# Altium PCB KC_Input_VAS_4L.PcbDoc
Units mil, origin at the board's own origin, x right, y up, seen from the top; angles counter-clockwise.
Board outline 2657.5 x 1450 mil, 4 copper layers (Component Side, Signal Layer 1, Signal Layer 2, Bottom Side), stack 33.234 mil thick; 45 components, 30 nets, 100 pads, 0 vias.
Unrouted connection lines stored in the file: 1.
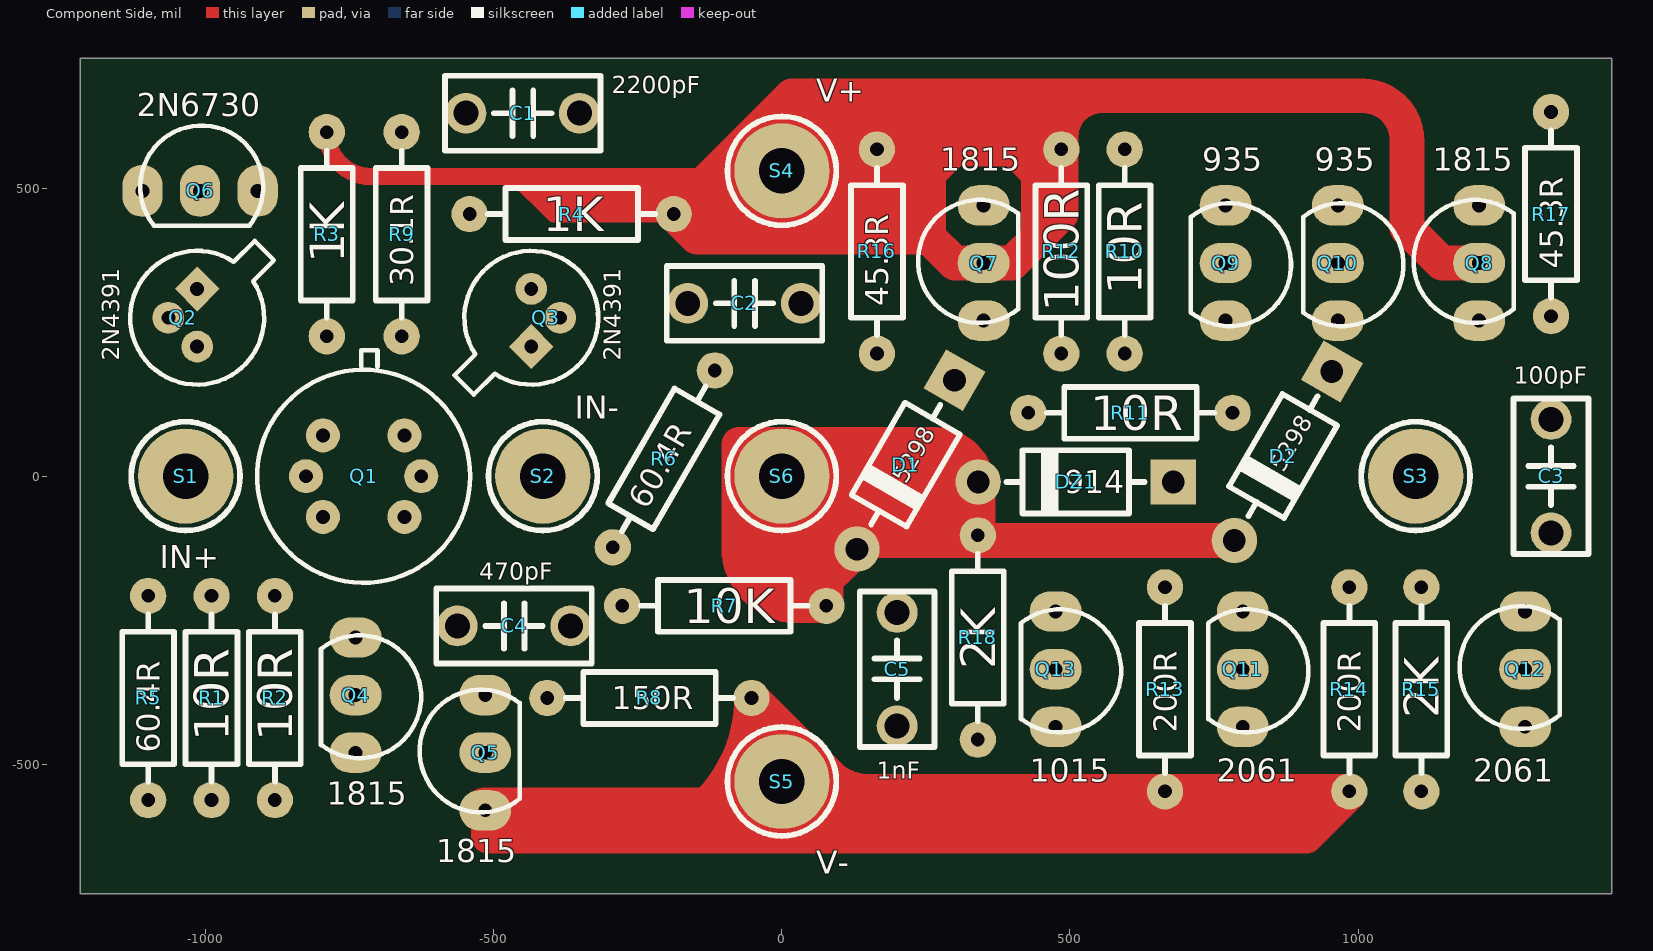
[diagram p0: Component Side view]
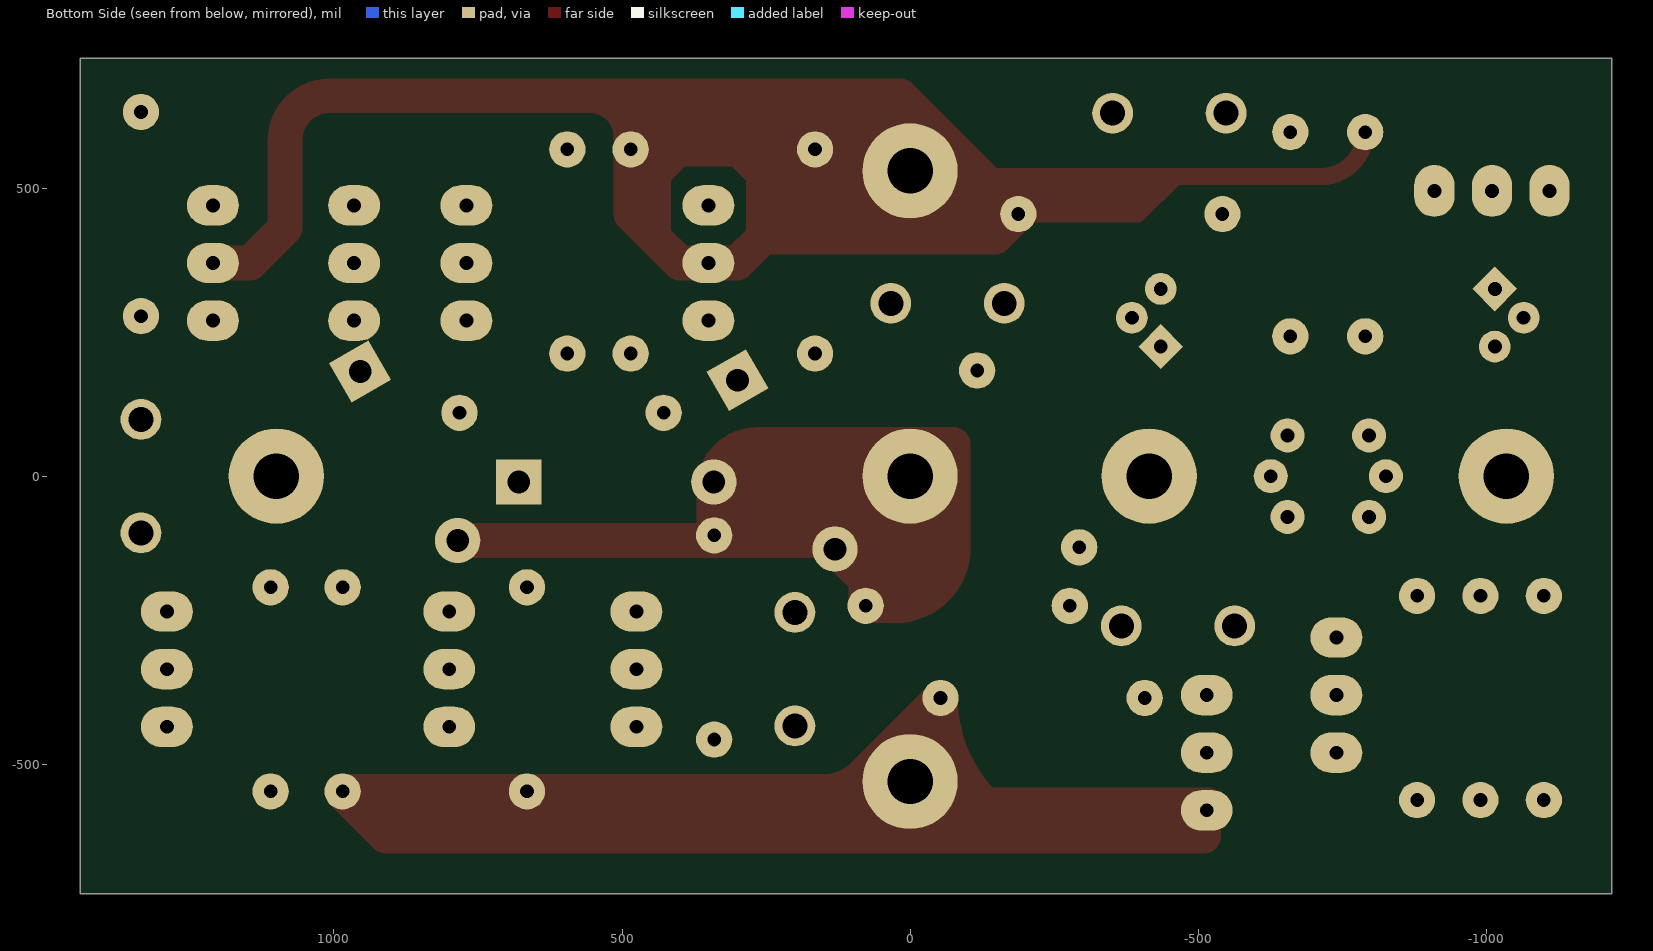
[diagram p1: Bottom Side view, seen from below]
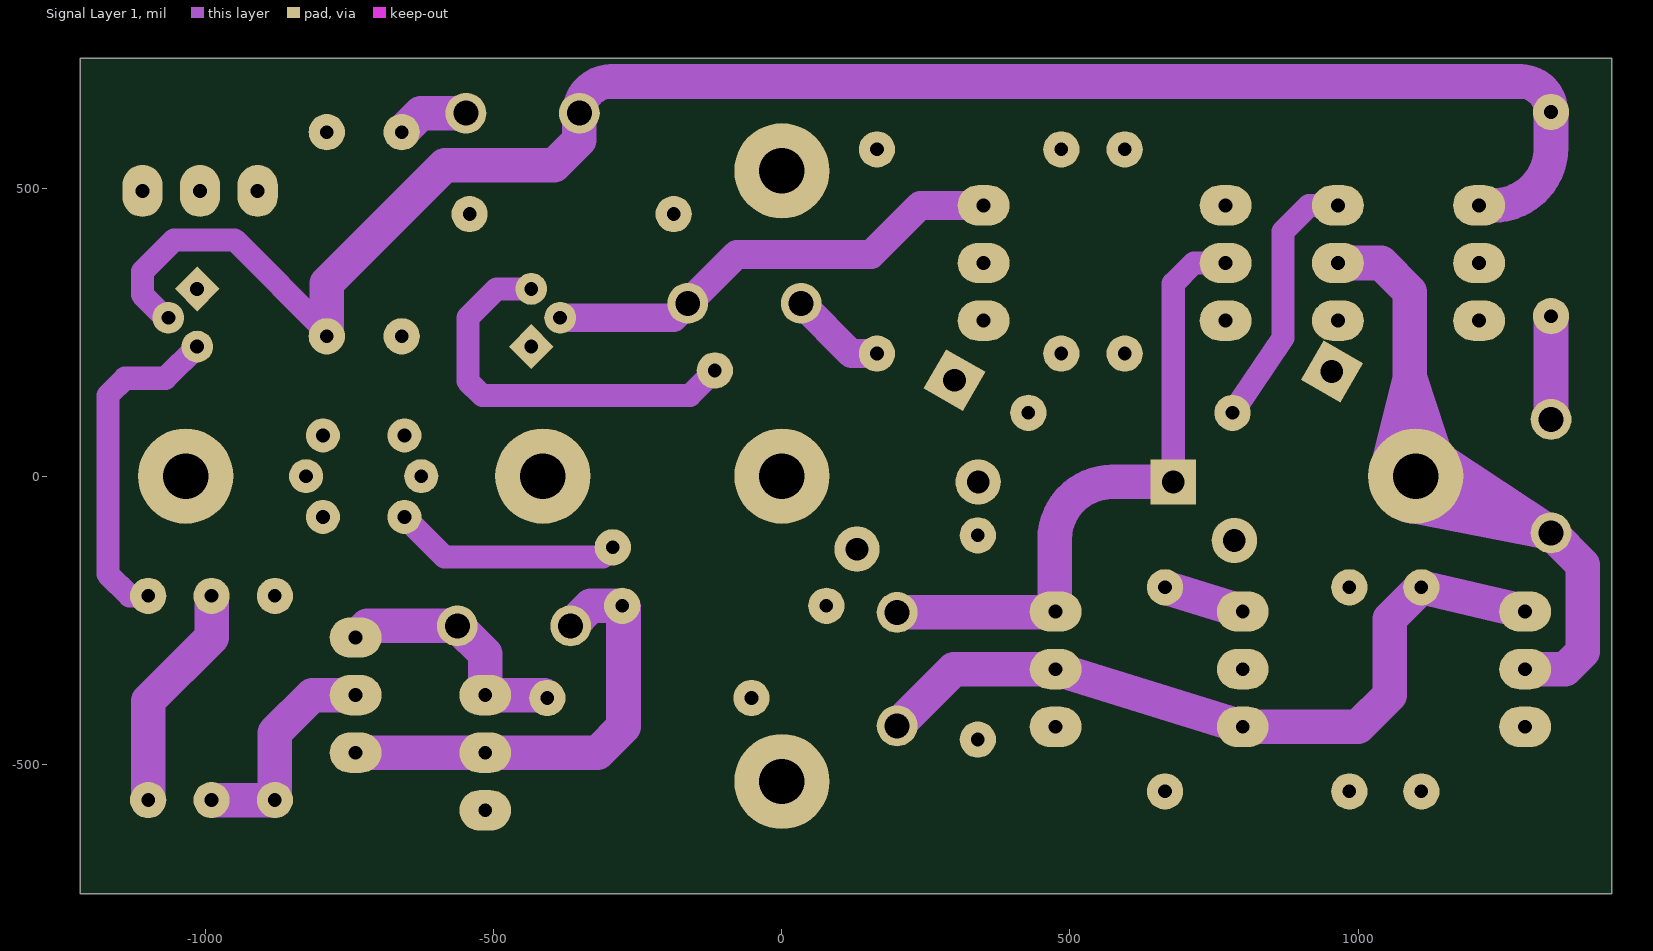
[diagram p2: Signal Layer 1]
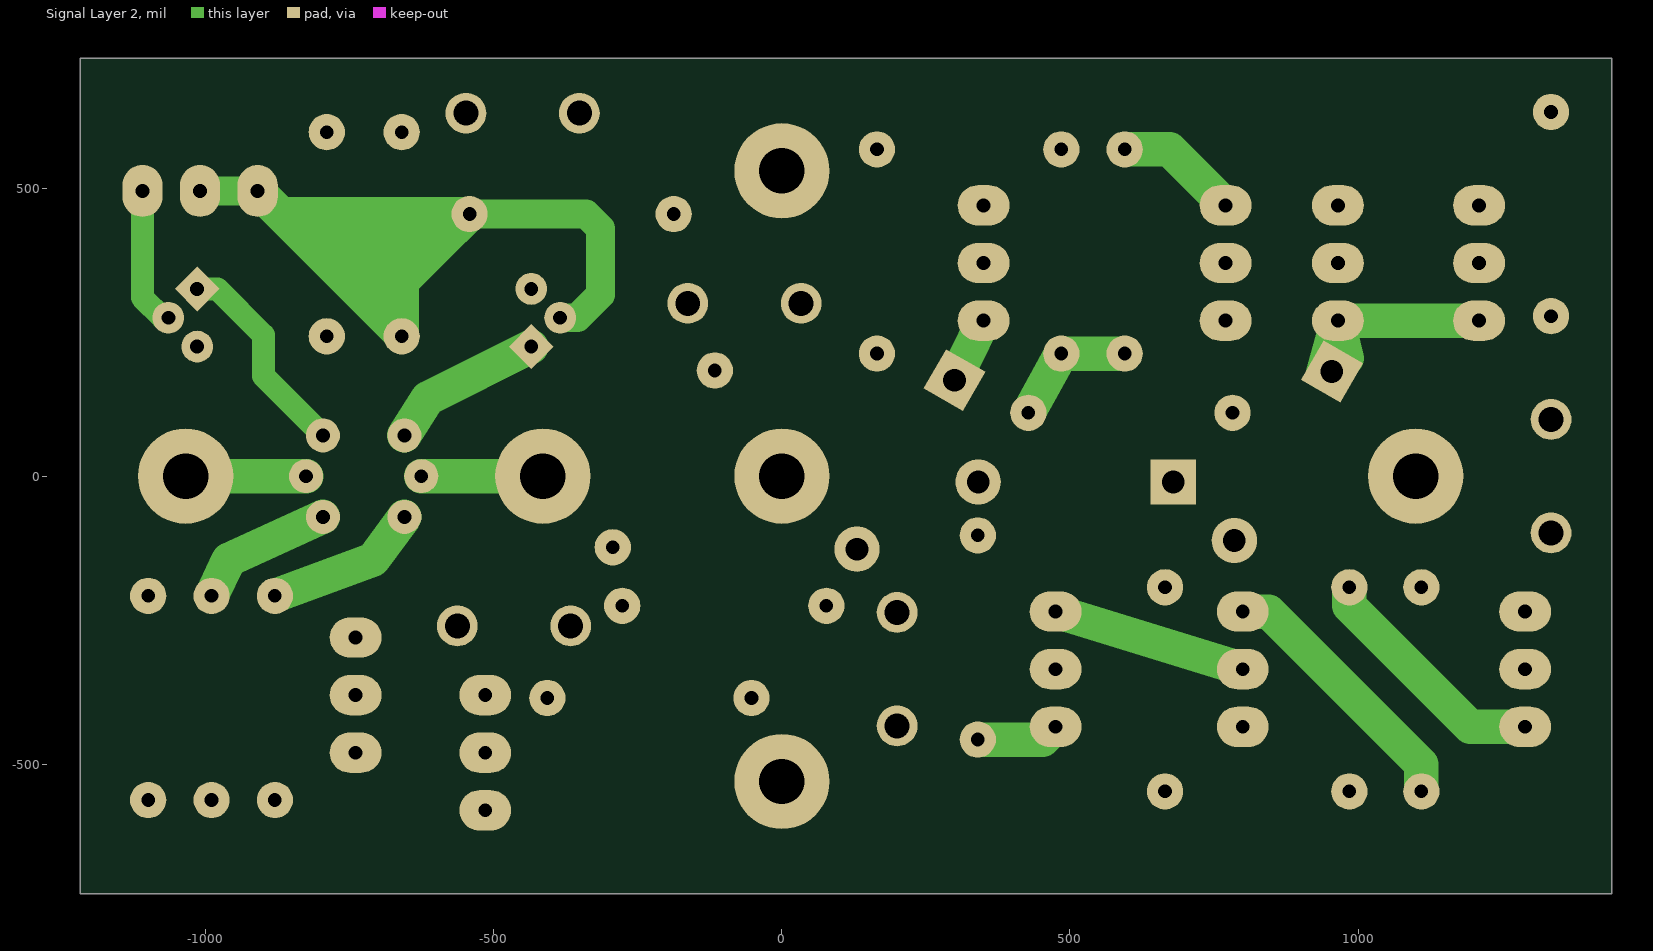
[diagram p3: Signal Layer 2]
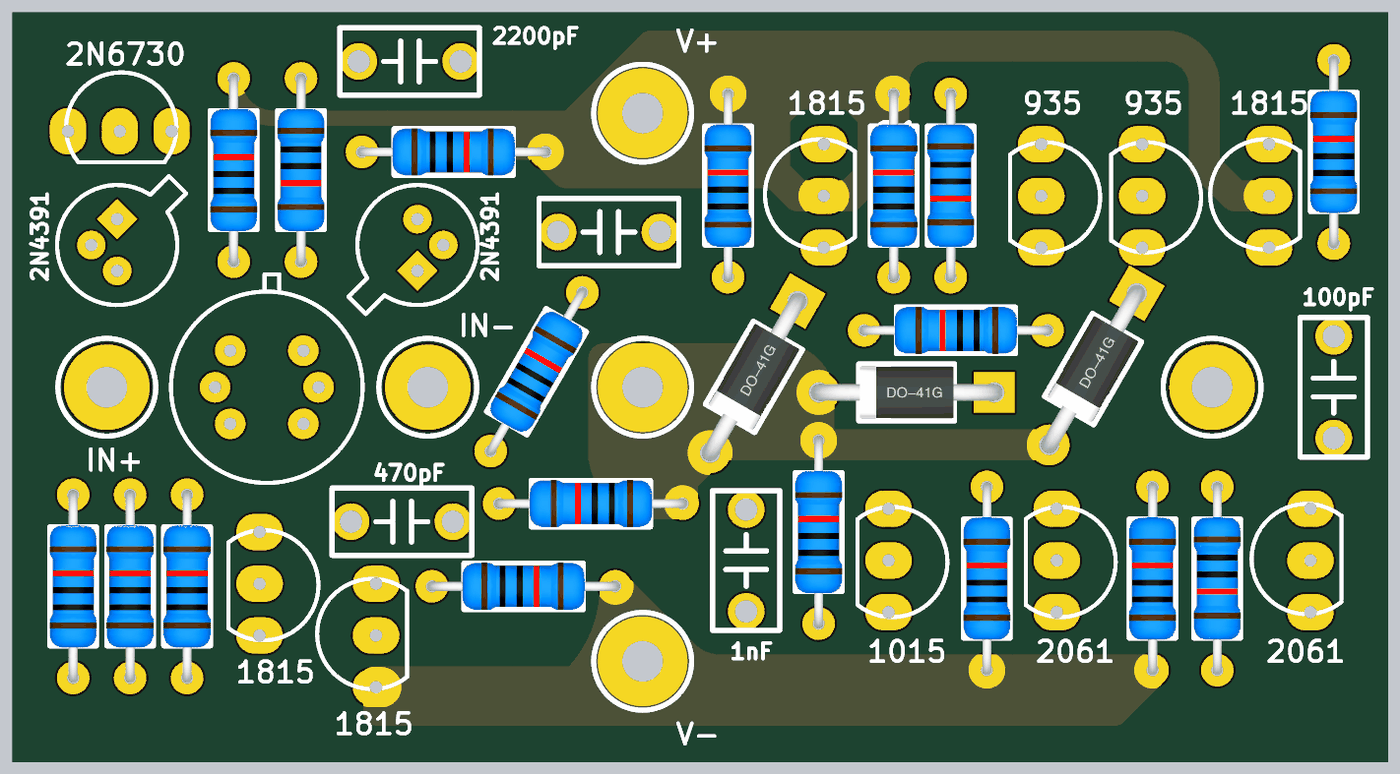
[diagram p4: 3D render of the assembled board from above, using the file's embedded part models]

## Layer stack, top to bottom
Top Solder: solder mask 0.4, Solder Resist, Dk 3.5
Component Side: signal copper 1.4
Dielectric 1: core 12.6, FR-4, Dk 4.8
Signal Layer 1: signal copper 1.417
Dielectric 5: prepreg 5, Dk 4.2
Signal Layer 2: signal copper 1.417
Dielectric 3: core 10, Dk 4.2
Bottom Side: signal copper 1.4
Bottom Solder: solder mask 0.4, Solder Resist, Dk 3.5

## Board outline
-1217.5,-725 -1217.5,725 1440,725 1440,-725

## Design rules (kind name [scope] priority, off if disabled: settings)
Clearance [All] p1: gap=10 ignorepadtopadclearanceinfootprint=FALSE except(0: Arc-Hole Track-Hole SMDPad-Hole THPad-Hole Via-Hole Fill-Hole Poly-Hole Region-Hole Text-Hole)
PlaneConnect [All] p1: planeconnectstyle=Direct reliefexpansion=20 reliefentries=4 reliefconductorwidth=10 reliefairgap=10
PolygonConnect [All] p1: connectstyle=Relief reliefconductorwidth=10 reliefentries=4 polygonreliefangle="90 Angle" airgapwidth=10
RoomDefinition KC_Input_VAS_Schematic [InComponentClass('KC_Input_VAS_Schematic')] p1: confinementstyle=ConfineIn formatcopy=TRUE lockcomponents=FALSE outline 1827.5,-660 12562.5,-660 12562.5,-50 1827.5,-50
RoutingVias [All] p1: holewidth=28 width=50 viastyle="Through Hole" minholewidth=28 minwidth=50 maxholewidth=28 maxwidth=50
SolderMaskExpansion [All] p1: expansion=4
Width [All] p1: maxlimit=110 minlimit=10 preferedwidth=60
29 further rules are at their usual default settings.

## Components (designator, comment, footprint, x,y, rotation, side; value= is the part's Value field where it differs from the comment)
C1 "2200pF" "CBB 6.3*6.3*5" -450,630 r180 top
C2 "1nF" "CBB 6.3*6.3*5" -65,300 r180 top
C3 "100pF" "CBB 6.3*6.3*5" 1335,0 r90 top
C4 "470pF" "CBB 6.3*6.3*5" -465,-260 r180 top
C5 "1nF" "CBB 6.3*6.3*5" 200,-335 r270 top
D1 "5298" DO-41G 215,20 r240 top
D2 "5298" DO-41G 870,35 r240 top
DZ1 "914" DO-41G 510,-10 r180 top
Q1 "MAT-02" TO78_SMALLHOLE -726,0 r135 top
Q2 "2N4391" TO-18_SMALLHOLE -1015,275 r270 top
Q3 "2N4391" TO-18_SMALLHOLE -435,275 r90 top
Q4 "1815" TO92A_SmallHole -740,-280 r0 top
Q5 "1815" TO92A_SmallHole -515,-580 r180 top
Q6 "2N6730" TO92A_SmallHole -1110,495 r90 top
Q7 "1815" TO92A_SmallHole 350,270 r180 top
Q8 "1815" TO92A_SmallHole 1210,270 r180 top
Q9 "935" TO92A_SmallHole 770,470 r0 top
Q10 "935" TO92A_SmallHole 965,470 r0 top
Q11 "2061" TO92A_SmallHole 800,-235 r0 top
Q12 "2061" TO92A_SmallHole 1290,-435 r180 top
Q13 "1015" TO92A_SmallHole 475,-235 r0 top
R1 "10R" "RS 1/4W" -990,-385 r90 top
R2 "10R" "RS 1/4W" -880,-385 r90 top
R3 "1K" "RS 1/4W" -790,420 r90 top
R4 "1K" "RS 1/4W" -365,455 r0 top
R5 "60.4R" "RS 1/4W" -1100,-385 r90 top
R6 "60.4R" "RS 1/4W" -205,30 r60 top
R7 "10K" "RS 1/4W" -100,-225 r180 top
R8 "150R" "RS 1/4W" -230,-385 r0 top
R9 "30.1R" "RS 1/4W" -660,420 r270 top
R10 "10R" "RS 1/4W" 595,390 r270 top
R11 "10R" "RS 1/4W" 605,110 r180 top
R12 "100R" "RS 1/4W" 485,390 r90 top
R13 "200R" "RS 1/4W" 665,-370 r90 top
R14 "200R" "RS 1/4W" 985,-370 r90 top
R15 "2K" "RS 1/4W" 1110,-370 r270 top
R16 "45.3R" "RS 1/4W" 165,390 r90 top
R17 "45.3R" "RS 1/4W" 1335,455 r90 top
R18 "2K" "RS 1/4W" 340,-280 r90 top
S1 "IN+" SCREW-M2-S -1035,0 r0 top
S2 "IN-" SCREW-M2-S -415,0 r0 top
S3 "OUT" SCREW-M2-S 1100,0 r0 top
S4 "V+" SCREW-M2-S 0,530 r0 top
S5 "V-" SCREW-M2-S 0,-530 r0 top
S6 "GND" SCREW-M2-S 0,0 r0 top

## Footprints (in the part's own frame and the unit in brackets; to place one, negate y for a bottom-side part, rotate by r counter-clockwise, add the part's x,y. Pads: shape width x height; smd on the part's side, far side on the other; paste and mask are expansions set on the pad)
"CBB 6.3*6.3*5" [mm] "脚距5mm高6.3mm厚3mm"
  round 1.8 hole 1.1: 1(-2.5,0) 2(2.5,0)
  silkscreen extent -3.43,-1.65 3.43,1.65, body extent -3.15,-1.5 3.15,1.5, height 6.8
DO-41G [mm] "2.5*8.6mm(直径，脚距）"
  rect 2x2 hole 1: 1(-4.3,0)
  round 2 hole 1: 2(4.3,0)
  silkscreen extent -3.05,-1.4 3.05,1.4, body extent -4.7,-1.25 4.7,1.25, height 2.55
"RS 1/4W" [mm] "直插色环电阻，脚距9mm，直径2.3mm"
  round 1.6 hole 0.6: 1(-4.5,0) 2(4.5,0)
  silkscreen extent -3.68,-1.14 3.68,1.14, body extent -4.72,-1.16 4.73,1.16, height 2.32
SCREW-M2-S [mm]
  round 4.2 hole 2: 1(0,0)
  silkscreen extent -2.4,-2.4 2.4,2.4
TO78_SMALLHOLE [mm]
  round 1.5 hole 0.61: 1(2.54,0) 2(1.796,1.796) 3(0,2.54) 5(-2.54,0) 7(0,-2.54)
  round 1.5 hole 0.61 paste+0: 6(-1.796,-1.796)
  silkscreen extent -4.7,-4.7 4.7,4.7
TO92A_SmallHole [mil]
  oval 90x70 hole 24.02: 1(0,0) 2(0,-100) 3(0,-200)
  silkscreen extent -60,-209 114,4
TO-18_SMALLHOLE [mm] "Can; 3 Leads; Pin Circle Dia. 2.54 mm; Lead Dia. 0.48 mm (max)"
  rect 1.4x1.4 hole 0.61 rot 45: 1(-1.27,0)
  round 1.4 hole 0.61: 2(0,-1.27) 3(1.27,0)
  silkscreen extent -3.39,-2.95 2.95,3.39

## Part data
C1 C2 C3 C4 C5: library part C-CBB, "CBB电容", BOM名称=CBB电容, 学习资源=www.ooocke.com, 版权归属=源创客
D1 D2: library part 1N5xxx, "Current Regulator Diodes"
DZ1: library part 1N914, "高速开关管 1V/0.25W"
Q1: "孪生对管-NPN型 40V/20ma"
Q2 Q3: "N沟道JFET开关管 40V/150ma"
Q4 Q5 Q7 Q8: library part 2SC1815, "音频放大-NPN型"
Q6: library part 2N6728/6729/6730, "中功率放大-PNP型"
Q9 Q10: library part 2SA935, "音频功放-PNP型 50V/500ma"
Q11 Q12: library part 2SC2061, "音频放大-NPN型 50V/500ma"
Q13: library part 2SA1015, "音频放大-PNP型"
R1 R2 R3 R4 R5 R6 R7 R8 R9 R10 R11 R12 R13 R14 R15 R16 R17 R18: library part R-CRR, "直插色环电阻", BOM名称=色环电阻, 学习资源=www.ooocke.com, 版权归属=源创客
S1 S2 S3 S4 S5 S6: library part ScrewConnector, "Screw Connector"

## Nets (pads, with @x,y where several pads share a name; then routed paths per layer and width w, separated by ;. In a path a pad name is that pad's centre, name@x,y a point inside that pad or via, vN(x,y) a via of type N, cw(c..) or ccw(c..) an arc to the next point about the centre after c; other vN are vias at no path point)
GND: D1.2 D2.2 DZ1.2 R7.1 R18.2 S6.1 | length 3281.4
  Component Side w60: S6.1@-75,-5 -75,-125 ; -30,-95 130.35,-95 D1.2 ; DZ1.2 DZ1.2@340.71,-20 ; D2.2 D1.2@145.35,-111.61 ; -75,-125 ccw(c25,-125) -74.5,-135 ; -75,-125 -75,-135 -74.5,-135 ; -74.5,-135 ccw(c25,-125) 25,-225 R7.1 77.17,-179.8 ; -74.5,-135 -25,-135 ; -25,-135 105.98,-135 D1.2@105.98,-150.98 ; -25,-135 -25,-175 10,-175 10,-179.8 77.17,-179.8 ; S6.1 0,-55 340.71,-55 ; S6.1 -75,0 -75,55 265.71,55 cw(c265.71,-20) DZ1.2@340.71,-20 ; S6.1 320.71,0 DZ1.2@340.71,-20 ; 77.17,-179.8 D1.2@105.98,-150.98 ; D1.2@105.98,-150.98 D1.2 ; D1.2 D1.2@145.35,-111.61 ; D1.2@145.35,-111.61 154.13,-102.83 R18.2 340.71,-102.13 340.71,-55 ; 340.71,-55 DZ1.2@340.71,-20
NetC1_1: C1.1 Q2.2 Q6.1 Q8.3 R3.1 R17.2 | length 3427.6
  Signal Layer 1 w40: Q2.2 -1070,275 -1110,315 -1110,355 -1055,410 -950,410 -790,250 R3.1
  Signal Layer 1 w60: R3.1@-790,250 -790,335 -585,540 -395,540 -351.57,583.43 C1.1 cw(c-296.57,630) -296.57,685 1282.17,685 cw(c1282.17,632.17) R17.2 1335,570 cw(c1235,570) 1235,470 Q8.3
  Signal Layer 2 w40: Q6.1 -1110,310 -1075,275 Q2.2
NetC1_2: C1.2 R9.1 | length 125.2
  Signal Layer 1 w60: R9.1 -627.17,630 C1.2
NetC2_1: C2.1 R16.1 | length 167.7
  Signal Layer 1 w50: C2.1 120.59,212.83 R16.1
NetC2_2: C2.2 Q3.2 Q6.2 Q6.3 Q7.3 R4.1 R9.2 | length 2712.8
  Signal Layer 1 w50: Q3.2 -188.43,275 C2.2 -78.43,385 155,385 240,470 Q7.3
  Signal Layer 2 w50: Q6.2 Q6.3 ; R4.1 -340,455 -315,430 -315,315 -355,275 Q3.2
  Signal Layer 2 w60: Q6.3 -870,455 ; R9.2 R9.2@-660,245 ; -870,455 -815,400 ; -870,455 R4.1 -597.17,400 ; -815,400 -775,360 ; -815,400 -597.17,400 ; -775,360 -720,305 ; -775,360 -682.83,360 -660,337.17 ; -720,305 R9.2@-660,245 ; -720,305 -687.83,337.17 -660,337.17 ; R9.2@-660,245 -660,337.17 ; -660,337.17 -597.17,400
NetC3_1: C3.1 Q10.2 Q12.2 S3.1 | length 1909.2
  Signal Layer 1 w60: Q10.2 1040,370 1090,320 1090,170 ; S3.1@1050,10 1050.59,12.35 1090,170 ; S3.1@1085,-50 1090.12,-50.99 C3.1 ; S3.1@1140,30 C3.1 ; S3.1@1150,-10 1142,14 1090,170 ; Q12.2 1360,-335 1390,-305 1390,-153.43 C3.1 ; 1090,170 1090,10 S3.1 C3.1
NetC3_2: C3.2 R17.1 | length 179.4
  Signal Layer 1 w60: C3.2 R17.1
NetC4_1: C4.1 Q4.3 Q5.2 R7.2 | length 795.6
  Signal Layer 1 w60: Q4.3 Q5.2 -320,-480 -275,-435 -275,-227.17 R7.2 ; C4.1 -331.57,-225 R7.2@-280,-225
NetC4_2: C4.2 Q4.1 Q5.3 R8.1 | length 434.8
  Signal Layer 1 w60: Q4.1 -720,-260 C4.2 -515,-308.43 Q5.3 -412.17,-380 R8.1
NetC5_1: C5.1 DZ1.1 Q9.2 Q11.2 Q13.1 | length 1455
  Signal Layer 1 w40: DZ1.1 679.29,334.29 715,370 Q9.2
  Signal Layer 1 w60: C5.1 Q13.1@473.43,-236.57 ; Q13.1 Q13.1@473.43,-236.57 ; DZ1.1 573.43,-10 ccw(c573.43,-110) 473.43,-110 Q13.1@473.43,-236.57
  Signal Layer 2 w60: Q13.1 Q11.2
NetC5_2: C5.2 Q11.3 Q12.3 Q13.2 R15.1 | length 1328.4
  Signal Layer 1 w60: C5.2 298.43,-335 Q13.2 Q11.3 1000,-435 1055,-380 1055,-247.83 R15.1 Q12.3
NetD1_2: D1.1 Q7.1 Q9.3 | length 115
  Signal Layer 2 w60: D1.1 Q7.1
NetD2_2: D2.1 Q8.1 Q10.3 | length 405.1
  Signal Layer 2 w60: D2.1@940,180 941.46,185.27 Q10.3 ; D2.1@980,205 Q10.3 ; Q8.1 Q10.3
NetQ1_1: Q1.1 Q2.1 | length 365.2
  Signal Layer 2 w40: Q2.1 -980,325 -900,245 -900,174 Q1.1
NetQ1_2: Q1.2 S1.1 | length 209
  Signal Layer 2 w60: S1.1 Q1.2
NetQ1_3: Q1.3 R1.2 R5.1 | length 648.9
  Signal Layer 1 w60: R5.1 -1100,-390 -990,-280 R1.2
  Signal Layer 2 w60: R1.2 -960,-145 Q1.3
NetQ1_5: Q1.5 R2.2 R6.1 | length 670.8
  Signal Layer 1 w40: Q1.5 -586,-140 -310.15,-140 R6.1
  Signal Layer 2 w60: R2.2 -710,-145 Q1.5
NetQ1_6: Q1.6 S2.1 | length 211
  Signal Layer 2 w60: Q1.6 S2.1
NetQ1_7: Q1.7 Q3.1 | length 277.1
  Signal Layer 2 w60: Q1.7 -615,135 Q3.1
NetQ2_2: Q2.3 R5.2 | length 585.9
  Signal Layer 1 w40: R5.2 -1132.17,-207.83 -1170,-170 -1170,140 -1140,170 -1070,170 Q2.3
NetQ3_2: Q3.3 R6.2 | length 697.6
  Signal Layer 1 w40: Q3.3 -495,325 -545,275 -545,165 -520,140 -159.85,140 R6.2
NetQ4_2: Q4.2 R1.1 R2.1 | length 394.1
  Signal Layer 1 w60: R1.1 R2.1 -880,-445 -815,-380 Q4.2
NetQ5_1: Q5.1 R8.2 R13.1 R14.1 S5.1 | length 5707.8
  Component Side w60: Q5.1 -510,-585 -510,-625 910,-625 950,-585 ; -140,-580 -129.08,-569.08 ccw(c-313.17,-385) R8.2 ; S5.1@-55,-550 S5.1@-54.73,-529.28 ; R8.2 80.04,-517.88 ccw(c150.75,-447.17) 150.75,-547.17 ; R8.2 S5.1 S5.1@5,-535 ; S5.1@5,-535 5,-580 5,-585 950,-585 ; S5.1@5,-535 17.17,-547.17 150.75,-547.17 ; 150.75,-547.17 R13.1 R14.1 985,-550 950,-585
  Component Side w80: Q5.1 -140,-580 5,-580 940,-580 R14.1@960,-560
NetQ7_2: Q7.2 Q8.2 R3.2 R4.2 R12.2 R16.2 S4.1 | length 7716
  Component Side w30: R3.2 ccw(c-712.83,597.17) -712.83,520 -460,520 ; -360,490 -270,455 ; -355,510 R4.2 ; -340.21,482.31 -355.38,476.94 ; -460,520 -392.07,520 ; -460,520 -395,455 -360,455 ; -392.07,520 cw(c-392.07,502.93) -375,502.93 -375,496.56 ; -392.07,520 -270,520 ; -375,470 ccw(c-360,470) -360,455 ; -375,470 -355.38,476.94 ; -375,470 -375,496.56 ; -375,470 -360,455 ; -375,470 -380,470 -410,500 -378.44,500 -375,496.56 ; -375,496.56 -355.38,476.94 ; -360,455 -270,455 ; -270,455 R4.2 ; -270,520 -252.83,520 ; -270,520 -244.72,500 R4.2 ; -252.83,520 cw(c-252.83,455) -203.35,497.15 ; -252.83,520 -140,520 cw(c-140,511.42) -131.42,511.42 -189.08,511.42 ccw(c-189.08,497.15) -203.35,497.15 ; -203.35,497.15 cw(c-252.83,455) R4.2
  Component Side w60: -300,500 -244.72,500 -232.83,500 R4.2 ; S4.1@-30,460 S4.1@-10.2,460 ; S4.1@40,495 29.29,484.29 cw(c-41.42,555) S4.1@-10.2,460 ; 140,435 140,542.17 R16.2 ; 435,620 25,620 0,595 S4.1@0,585 ; 440,530 402.83,567.17 ; Q8.2 1145,370 1085,430 1085,583.38 ccw(c1008.38,583.38) 1008.38,660 555,660 ; R4.2 S4.1 ; R4.2 -131.42,511.42 -87.12,555.71 ; R4.2 -41.42,455 ccw(c-41.42,555) S4.1@-10.2,460 ; R4.2 -147.83,415 200,415 ; -87.12,555.71 cw(c-16.41,485) -16.41,585 S4.1@0,585 ; -87.12,555.71 17.17,660 555,660 ; S4.1@-10.2,460 80,460 95,445 95,567.17 ; S4.1 S4.1@0,585 ; S4.1 37.17,567.17 95,567.17 ; S4.1@0,585 95,585 ; 95,567.17 R16.2 ; 95,567.17 95,585 ; 95,585 255,585 ; R16.2 255,567.17 ; R16.2 200,532.17 200,415 ; 200,415 255,415 ; 255,415 255,525 ; 255,415 300,370 Q7.2 400,370 445,415 ; 255,525 255,567.17 ; 255,525 297.17,567.17 ; 255,567.17 255,585 ; 255,567.17 297.17,567.17 ; 255,585 315,585 ; 297.17,567.17 315,585 ; 297.17,567.17 402.83,567.17 ; 315,585 385,585 ; 385,585 402.83,567.17 ; 385,585 440,585 445,580 445,567.17 ; 402.83,567.17 445,567.17 ; 445,415 445,567.17 ; 445,415 485,455 R12.2 ; 445,567.17 R12.2 ; R12.2 485,590 cw(c555,590) 555,660
NetQ9_1: Q9.1 R10.1 | length 215.2
  Signal Layer 2 w60: R10.1 672.83,567.17 Q9.1
NetQ10_1: Q10.1 R11.1 | length 455.5
  Signal Layer 1 w40: R11.1 870,240 870,425 915,470 Q10.1
NetQ11_1: Q11.1 R13.2 R15.2 | length 608.4
  Signal Layer 1 w60: R13.2 Q11.1
  Signal Layer 2 w60: Q11.1 845,-235 1110,-500 R15.2
NetQ12_1: Q12.1 R14.2 | length 424.2
  Signal Layer 2 w60: R14.2 985,-225 1195,-435 Q12.1
NetQ13_3: Q13.3 R18.1 | length 144.2
  Signal Layer 2 w60: R18.1 452.83,-457.17 Q13.3
NetR10_2: R10.2 R11.2 R12.1 | length 227.7
  Signal Layer 2 w60: R11.2 R12.1 R10.2

## Silkscreen, mask and mechanical layers (free items; w line width, h text height)
Mechanical 1:
  the board outline again, w10
Drill Drawing:
  the board outline again, w10